# Altium PCB LbElectric.PcbDoc (part 1 of 2)
Units mil, origin at the board's own origin, x right, y up, seen from the top; angles counter-clockwise.
Board outline 7067.96 x 2323.86 mil, 2 copper layers (Top Layer, Bottom Layer), stack 12.8 mil thick; 133 components, 113 nets, 507 pads, 49 vias.
Unrouted connection lines stored in the file: 3.
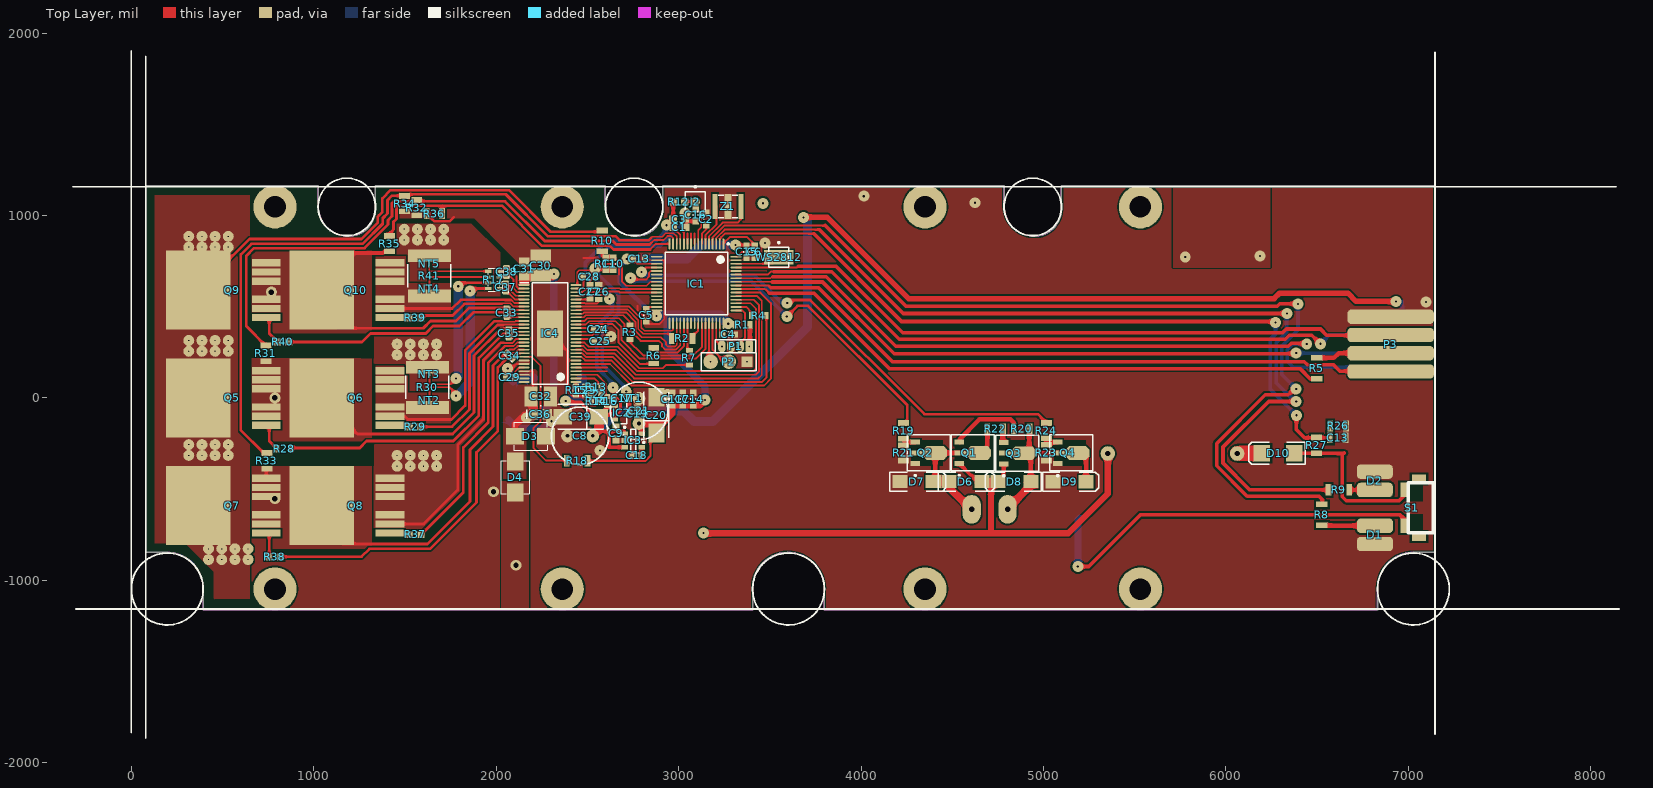
[diagram p0: Top Layer view]
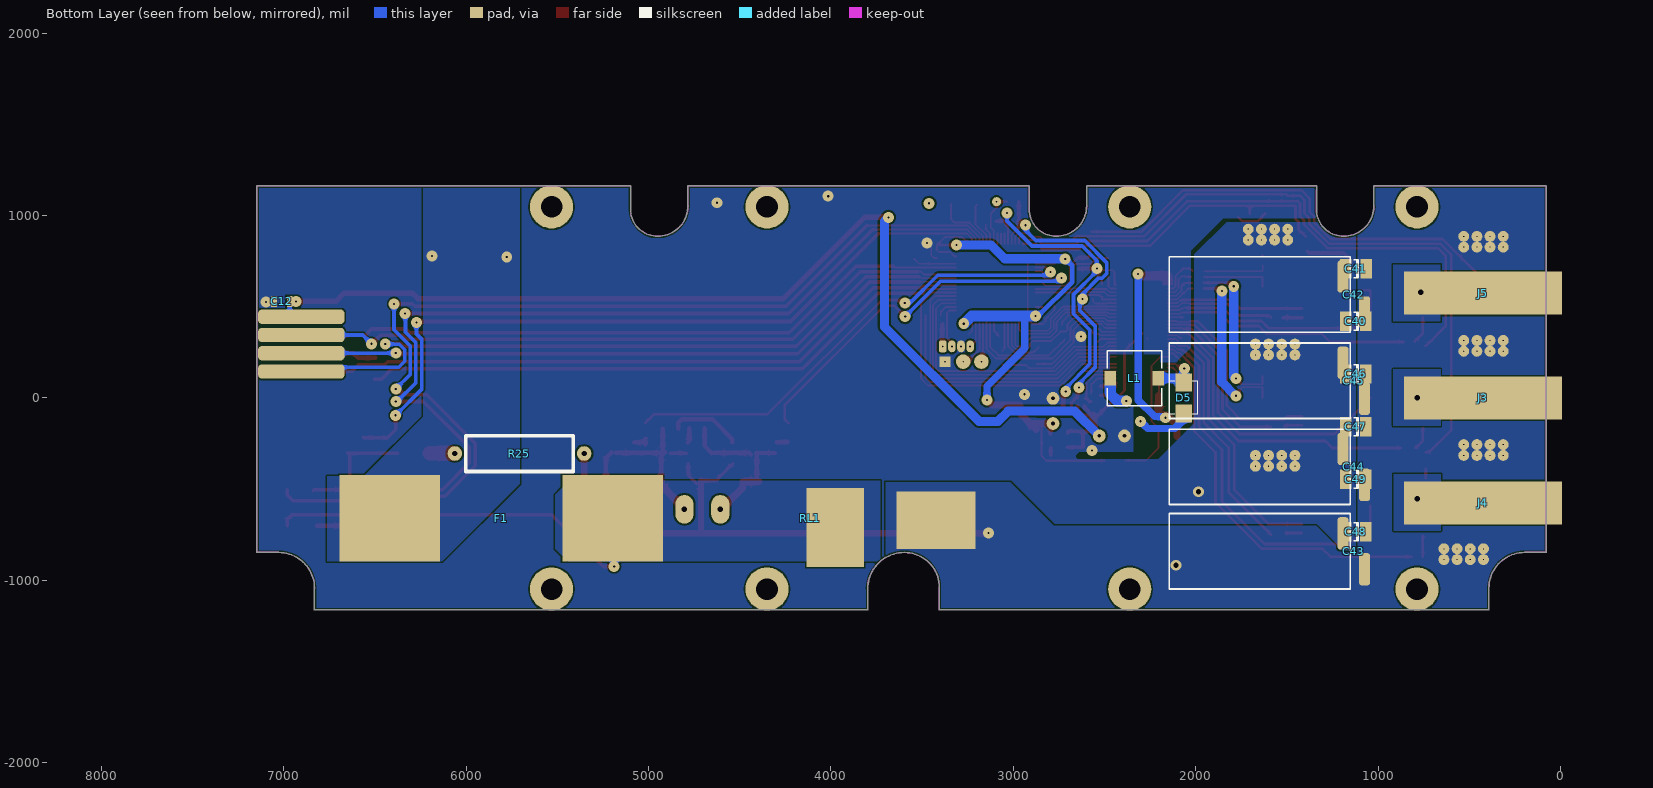
[diagram p1: Bottom Layer view, seen from below]

## Layer stack, top to bottom
Top Solder: solder mask 0.4, Solder Resist, Dk 3.5
Top Layer: signal copper 1.4
Dielectric1: core 10, FR-4, Dk 4.2
Bottom Layer: signal copper 1.4
Bottom Solder: solder mask 0.4, Solder Resist, Dk 3.5

## Board outline
196.85,-846.97 cw(c196.85,-1043.31) 393.19,-1043.31 393.19,-1161.42 ccw(c393.7,-1161.42) 393.7,-1161.93 3405.51,-1161.93 ccw(c3405.51,-1161.42) 3406.03,-1161.42 3406.03,-1038.53 cw(c3597.59,-1038.53) 3597.59,-846.97 cw(c3597.59,-1048.08) 3798.7,-1048.08 3798.7,-1161.42 ccw(c3799.21,-1161.42) 3799.21,-1161.93 6830.71,-1161.93 ccw(c6830.71,-1161.42) 6831.22,-1161.42 6831.22,-1043.31 cw(c7027.56,-1043.31) 7027.56,-846.97 7145.67,-846.97 ccw(c7145.67,-846.46) 7146.18,-846.46 7146.18,1161.42 ccw(c7145.67,1161.42) 7145.67,1161.93 5098.43,1161.93 ccw(c5098.43,1161.42) 5097.91,1161.42 5097.91,1034.17 cw(c4950.08,1034.17) 4950.08,886.34 cw(c4950.08,1052.44) 4783.98,1052.44 4783.98,1161.42 ccw(c4783.46,1161.42) 4783.46,1161.93 2913.39,1161.93 ccw(c2913.39,1161.42) 2912.87,1161.42 2912.87,1034.17 cw(c2765.04,1034.17) 2765.04,886.34 cw(c2765.04,1052.44) 2598.94,1052.44 2598.94,1161.42 ccw(c2598.43,1161.42) 2598.43,1161.93 1338.58,1161.93 ccw(c1338.58,1161.42) 1338.07,1161.42 1338.07,1034.17 cw(c1190.24,1034.17) 1190.24,886.34 cw(c1190.24,1052.44) 1024.14,1052.44 1024.14,1161.42 ccw(c1023.62,1161.42) 1023.62,1161.93 78.74,1161.93 ccw(c78.74,1161.42) 78.23,1161.42 78.23,-846.46 ccw(c78.74,-846.46) 78.74,-846.97

## Design rules (kind name [scope] priority, off if disabled: settings)
AssemblyTestPointUsage [All] p1 off:
AssemblyTestpoint [All] p1 off: testpointundercomponent=TRUE minsize=40 maxsize=100 preferedsize=60 minholesize=0 maxholesize=40 preferedholesize=32 testpointgrid=1 usegrid=TRUE gridtolerance=0.01 allowsidetop=TRUE allowsidebottom=TRUE
Clearance Clearance_Phases [InPolygon and InNetClass('Phases')] p1: gap=5 except(7: Arc-Poly Track-Poly SMDPad-Poly THPad-Poly Via-Poly Fill-Poly Poly-Poly)
Clearance "Clearance pads mounting" [(InNet('HOUSING_0') OR InNet('HOUSING_1') OR InNet('HOUSING_2')) AND IsPad] p2: gap=0.1
Clearance "Clearance main" [All] p3: gap=5.12 except(7.09: SMDPad-SMDPad SMDPad-THPad THPad-THPad; 8.27: SMDPad-Via THPad-Via Via-Via; 10.5: Arc-Poly Track-Poly SMDPad-Poly THPad-Poly Via-Poly Fill-Poly Poly-Poly)
ComponentClearance [All] p1 off: gap=10 collisioncheckmode=3 verticalgap=10 showdistances=FALSE
DiffPairsRouting [All] p1: maxlimit=10 minlimit=5 mostfreqgap=5 toplayer_minwidth=6 toplayer_maxwidth=25 toplayer_prefwidth=8 bottomlayer_minwidth=6 bottomlayer_maxwidth=25 bottomlayer_prefwidth=8 maxuncoupledlength=500
FabricationTestPointUsage [All] p1 off: valid=0 allowmultiple=FALSE
FabricationTestpoint [(IsPad And (OnTopLayer Or OnBottomLayer))] p1 off: side=3 testpointundercomponent=TRUE minsize=40 maxsize=100 preferedsize=60 minholesize=0 maxholesize=40 preferedholesize=32 testpointgrid=1 allowsidetop=TRUE allowsidebottom=TRUE usegrid=TRUE gridtolerance=0.01
HoleToHoleClearance [All] p1: gap=5.12 allowstackedmicrovias=TRUE
MinimumSolderMaskSliver [All] p1: minsoldermaskwidth=1.97
NetAntennae [All] p1 off: netantennaetolerance=10
PlaneClearance [All] p1: clearance=10
PlaneConnect [All] p1: planeconnectstyle=Direct reliefexpansion=7.87 reliefentries=4 reliefconductorwidth=0 reliefairgap=7.87
PolygonConnect [All] p1: connectstyle=Direct reliefconductorwidth=11.81 reliefentries=4 polygonreliefangle="90 Angle" airgapwidth=11.81
RoutingVias [All] p1: holewidth=11.81 width=60 viastyle="Through Hole" minholewidth=7.87 minwidth=55 maxholewidth=25 maxwidth=100
SilkToSilkClearance [All] p1 off: silktosilkclearance=3.94
SilkToSolderMaskClearance SilkscreenOverComponentPads [IsPad] p1 off: minsilkscreentomaskgap=5.12 clearancetoexposedcopper=TRUE
SolderMaskExpansion [All] p1: expansion=7.87
Width [All] p1: maxlimit=236.22 minlimit=10 preferedwidth=10
17 further rules are at their usual default settings.

## Classes and differential pairs
net class Control: 1_H_CONTROL 1_L_CONTROL 2_H_CONTROL 2_L_CONTROL 3_H_CONTROL NetIC1_34 NetIC1_52 NetIC1_53 SPI_SCK
net class Buck: NetC29_1 NetC29_2 NetIC4_3
net class "FET Drive": _CTRL_GND NetC33_2 NetC34_2 NetC35_2 PHASE_1 PHASE_2 PHASE_3 UH_P UL_N UL_P VH_P VL_P WH_P WL_N WL_P
net class Stabilizers: _3.3V _5V _AGND _REF NetC18_1
net class Sense: 1_SENSE 2_SENSE AN_IN NetC37_1 NetC37_2 NetC38_1 NetC38_2 NetNT2_1 NetNT3_1 NetNT4_1 NetNT5_1 TEMP_MOTOR
component class DRV1: C22 C23 C24 C25 C26 C27 C28 C29 C30 C31 C32 C33 C34 C35 C36 C37 C38 C39 D3 D4 D5 IC4 L1 R13 R14 R15 R16 R17 R18
component class PWR1: C40 C41 C42 C43 C44 C45 C46 C47 C48 C49 NT2 NT3 NT4 NT5 NT6 NT7 NT8 NT9 NT10 NT11 NT12 NT304 NT? Q5 Q6 Q7 Q8 Q9 Q10 R28 R29 R30 R31 R32 R33 R34 R35 R36 R37 R38 R39 R40 R41 VT?
component class CTR1: C1 C2 C3 C4 C5 C6 C7 C8 C9 C10 C11 C12 C13 C14 C15 C16 C17 C18 C19 C20 C21 D1 D2 H2.1 HL1 IC1 IC2 IC3 J2 NT1 P1 P2 P3 R1 R2 R3 R4 R5 R6 R7 R8 R9 R10 R11 R12 WS2812 Y1 Z1
component class Main: C13 D6 D7 D8 D9 D10 F1 J3 J4 J5 Q1 Q2 Q3 Q4 R19 R20 R21 R22 R23 R24 R25 R26 R27 RL1 S1

## Components (designator, comment, footprint, x,y, rotation, side; value= is the part's Value field where it differs from the comment)
C1 "2.2u" ERA-0603 3004,936 r0 top
C2 "0.1u" CAPC1608X08N(0603) 3152,981 r90 top
C3 "0.1u" ERA-0603 3003,981 r0 top
C4 "2.2u" CAPC1608X08N(0603) 3273,348 r0 top
C5 "2.2u" CAPC1608X08N(0603) 2823,453 r270 top
C6 "2.2u" CAPC1608X08N(0603) 3417,801 r270 top
C7 "2.2u" CAPC1608X08N(0603) 3022,-6 r90 top
C8 "CAP TANT POLY 220UF 6.3V 2312 15mOhm" CAP_POLY_330 2460,-208 r180 top
C9 "0.1u" ERA-0603 2657,-194 r270 top
C10 "0.1u" CAPC1608X08N(0603) 2641,735 r270 top
C11 "0.1u" CAPC1608X08N(0603) 2964,-6 r90 top
C12 "0.1u" 0805x 7010,529 r0 bottom
C13 "0.1u" CAPC1608X08N(0603) 2783,764 r0 top
C13 "0.1u" 0805x 6613,-218 r0 top
C14 "0.1u" CAPC1608X08N(0603) 3081,-6 r90 top
C15 "0.1u" CAPC1608X08N(0603) 3372,801 r270 top
C16 "0.1u" CAPC1608X08N(0603) 3093,1003 r270 top
C17 "0.1u" 0603x 2687,-2 r0 top
C18 "10nf 50V 10%" 0402small 2770,-315 r180 top
C19 "2.2u" CAPC1608X08N(0603) 2773,-86 r90 top
C20 "CAP TANT POLY 220UF 6.3V 2312 15mOhm" C 2878,-94 r90 top
C21 "CAP TANT POLY 220UF 6.3V 2312 15mOhm" CAP_POLY_330 2783,-71 r90 top
C22 "120pF 50V 5%" 0402small 2548,20 r0 top
C23 "6.8nF 50V 10%" 0402small 2490,41 r90 top
C24 "22nF 50V 10%" 0402small 2559,378 r180 top
C25 "2.2u 25V 10%" CAPC1608X08N(0603) 2569,312 r180 top
C26 "2.2uF 25V" 0603x 2562,581 r90 top
C27 "2.2u" 0603x 2514,582 r90 top
C28 "2.2u" CAPC1608X08N(0603) 2509,665 r0 top
C29 "0.1uF 50V" 0402small 2075,113 r0 top
C30 "2.2u 100V" "EIA CC1210" 2244,726 r90 top
C31 "0.1u" C0805 2154,707 r90 top
C32 "2.2u 100V" "EIA CC1210" 2244,9 r0 top
C33 "0.22uF 50V" 0402small 2058.41,467.54 r270 top
C34 "0.22uF 50V" 0402small 2073,231 r315 top
C35 "0.22uF 50V" 0402small 2068.41,353.43 r270 top
C36 "0.1u" C0805 2242,-89 r0 top
C37 "1nF 50V" 0402small 2053,606 r270 top
C38 "1nF 50V" 0402small 2057,691 r270 top
C39 "CAP TANT POLY 220UF 6.3V 2312 15mOhm" C 2464,-103 r180 top
C40 "2.2uF 100V" 1210 1122.43,420.15 r0 bottom
C41 "2.2uF 100V" 1210 1122.05,708.66 r0 bottom
C42 "1000uF 35V 10%" CAP_1000u_35V 1153.54,370.08 r90 bottom
C43 "1000uF 35V 10%" CAP_1000u_35V 1153.54,-1037.4 r90 bottom
C44 "1000uF 35V 10%" CAP_1000u_35V 1153.54,-574.8 r90 bottom
C45 "1000uF 35V 10%" CAP_1000u_35V 1153.54,-102.36 r90 bottom
C46 "2.2uF 100V" 1210 1122.43,131.64 r0 bottom
C47 "2.2uF 100V" 1210 1122.43,-156.87 r0 bottom
C48 "2.2uF 100V" 1210 1122.43,-733.89 r0 bottom
C49 "2.2uF 100V" 1210 1122.43,-445.38 r0 bottom
D1 "LED0" LED_3mm_SMD 6817,-750.22 r0 top
D2 "LED0" LED_3mm_SMD 6816,-454 r180 top
D3 "CDBB2100-G" SMB_real 2188,-210 r180 top
D4 "CDBB2100-G" SMB_real 2104,-434 r90 top
D5 "CDBB2100-G" SMB_real 2066.93,0 r90 bottom
D6 "Diode" DO214 4572,-458 r0 top
D7 "Diode" DO214 4305,-458 r0 top
D8 "Diode" DO214 4840,-458 r180 top
D9 "Diode" DO214 5142.9,-459 r0 top
D10 "Diode" SMB 6286,-303 r180 top
F1 "Fuse 1" FUSE_BIG 5807.09,-659.45 r0 bottom
IC1 "STM32F405" LQFP64_L 3097.66,627.02 r270 top
IC2 "LT1460KCS3-3.3" SOT23-3_L 2688,-81 r0 top
IC3 "TPS73233DBVT" SOT23-5_L 2751,-233 r0 top
IC4 "DRV8301DCAR" HTSSOP56(L) 2294.94,353.43 r180 top
J2 "Socket" PIN1#1 3092,1076 r0 top
J3 "1" BANANA-4MM 426.89,0 r180 top locked
J4 "2" BANANA-4MM 426.89,-574.8 r180 top locked
J5 "3" BANANA-4MM 426.89,574.8 r180 top locked
L1 "33u" DR74 2337,108 r0 bottom
NT1 "NET_TIE" NET_TIE_10mil 2749,-2 r180 top net-tie
NT2 "NET_TIE" NET_TIE_10mil 1634,-17 r90 top net-tie
NT3 "NET_TIE" NET_TIE_10mil 1633.86,135.8 r270 top net-tie
NT4 "NET_TIE" NET_TIE_10mil 1634,595 r90 top net-tie
NT5 "NET_TIE" NET_TIE_10mil 1633,742 r270 top net-tie
P1 "Header 4" MHDR1X4 3387,283 r180 top
P2 "Header 3" HDR1X3 3375,199 r180 top
P3 "Header 4X2" Nrf24l01 6903.07,295.28 r0 top
Q1 "BCX53" SOT89x 4593.05,-301.27 r270 top
Q2 "BCX56-16" SOT89x 4352.15,-301.27 r270 top
Q3 "BCX53" SOT89x 4837.05,-302.27 r270 top
Q4 "BCX56-16" SOT89x 5132.05,-301.27 r270 top
Q5 "IRF7530" D2PAK-7 366.14,0 r90 top locked
Q6 "IRF7530" D2PAK-7 1043.31,0 r90 top locked
Q7 "IRF7530" D2PAK-7 366.14,-590.55 r90 top locked
Q8 "IRF7530" D2PAK-7 1043.31,-590.55 r90 top locked
Q9 "IRF7530" D2PAK-7 366.14,590.55 r90 top locked
Q10 "IRF7530" D2PAK-7 1043.31,590.55 r90 top locked
R1 "Res1" 0603x 3350,401 r180 top
R2 "Res1" 1206x 3019,326 r0 top
R3 "Res1" 0603x 2733,360 r270 top
R4 "Res1" 0603x 3440,452 r180 top
R5 "Res1" 1206x 6498,163 r90 top
R6 "Res1" 0805x 2863,232 r90 top
R7 "Res1" 0603x 3059,221 r270 top
R8 "Res1" 1206x 6526,-640 r270 top
R9 "Res1" 1206x 6619,-504 r0 top
R10 "39k, 1%" 1206x 2581,861 r270 top
R11 "2.2k, 1%" RESC1608X05N(0603) 2601,735 r270 top
R12 "10k, 1%" RESC1608X05N(0603) 3002,1075 r0 top
R13 "15k, 1%" 0402small 2549,61 r0 top
R14 "3.3k, 1%" 0402small 2548,-19 r180 top
R15 "220k, 1%" 0402small 2438,41 r270 top
R16 "18k, 1%" 0402small 2610,-17 r90 top
R17 "100R" RES_ARRAY_4X 1987,679 r270 top
R18 "0" 1206x 2444,-344 r180 top
R19 "Res Semi" 0805x 4233,-180 r90 top
R20 "Res Semi" 0805x 4880,-169 r0 top
R21 "Res Semi" 0805x 4233,-302 r270 top
R22 "Res Semi" 0805x 4735,-169 r0 top
R23 "Res Semi" 0805x 5016,-300 r270 top
R24 "Res Semi" 0805x 5016,-178 r90 top
R25 "Res Semi" RES_2W 5412,-206 r0 bottom
R26 "Res Semi" 0805x 6615,-153 r0 top
R27 "Res Semi" 0805x 6497,-259 r90 top
R28 "4R7" 0603x 838,-278 r180 top
R29 "4R7" RESC1608X05N(0603) 1555.12,-157.48 r180 top
R30 "RES SMD 0.01 OHM 1% 2W 2512" 1T-2512-5x 1623,58 r90 top
R31 "39k, 1%" 0805x 738,245 r90 top
R32 "2.2k, 1%" 0805x 1565,1044 r90 top
R33 "39k, 1%" 0805x 743,-344 r90 top
R34 "2.2k, 1%" 0805x 1498,1066 r90 top
R35 "39k, 1%" 0805x 1415.53,846 r90 top
R36 "2.2k, 1%" 0805x 1662,1011 r0 top
R37 "4R7" RESC1608X05N(0603) 1555.12,-748.03 r180 top
R38 "4R7" RESC1608X05N(0603) 785,-871 r180 top
R39 "4R7" RESC1608X05N(0603) 1555,440 r180 top
R40 "4R7" RESC1608X05N(0603) 831,307 r180 top
R41 "RES SMD 0.01 OHM 1% 2W 2512" 1T-2512-5x 1633.86,669.29 r90 top
RL1 "RELAY_LATCH" LATCH_RELAY 3503.94,-610.24 r90 bottom
S1 "SW-PB" BTN_SMD_CORNER 6999,-464 r270 top
WS2812 "Socket" PIN1#2 3549,771 r0 top
Z1 "AWSCR-8.00CV-T" CRYSTAL_CERAMIC 3270,1050 r180 top

## Footprints (in the part's own frame and the unit in brackets; to place one, negate y for a bottom-side part, rotate by r counter-clockwise, add the part's x,y. Pads: shape width x height; smd on the part's side, far side on the other; paste and mask are expansions set on the pad)
1T-2512-5x [mm] "Chip Resistor; Body 6.4 x 3.2 mm (LxW typ)"
  rect 1.8x6 smd: 1(-2.8,0) 2(2.8,0)
  silkscreen extent -1.6,-3 1.6,3
0402small [mm] "Chip Resistor; Body 1.6 x 0.8 mm (LxW typ)"
  rect 0.7x0.8 smd: 1(-0.635,0) 2(0.635,0)
  silkscreen extent -0.8,-0.4 0.8,0.4
0603x [mm] "Chip Resistor; Body 1.6 x 0.8 mm (LxW typ)"
  rect 0.7x1 smd: 1(-1.016,0) 2(1.016,0)
0805x [mil] "Chip Resistor; Body 2 x 1.3 mm (LxW typ)"
  rect 33x59.06 smd: 1(42,0)
  rect 30x59.06 smd: 2(-43,0)
1206x [mm]
  rect 0.8x1.6 smd: 1(-1.45,0) 2(1.45,0)
1210 [mm] "Chip Capacitor; Body 3.2 x 2.5 mm (LxW typ)"
  rect 1.6x2.7 smd: 1(-1.4,0) 2(1.4,0)
  silkscreen extent -0.3,-1.25 0.3,1.25
BANANA-4MM [mm]
  rect 22x6 smd far side: 1(0,0)
  body extent -10.5,-3 10.5,3, height 5.79
BTN_SMD_CORNER [mm]
  rect 2x1.2 smd: 1(1,-0.5) 2(6,-0.5)
  rect 1.2x2 smd: 3(-0.5,1.5) 3(7.5,1.5)
  silkscreen extent 0,0 7,3.5
C [mm] "Capacitor, SM Tantalum; Body 6.0 x 3.2 mm (LxW typ)"
  rect 2.6x2.2 smd: 1(-2.5,0) 2(2.5,0)
  silkscreen extent -3.92,-1.75 3.15,1.87
C0805 [mm] "Chip Capacitor; Body 2.0 x 1.2 mm (LxW typ)"
  rect 1.3x1.5 smd: 1(-0.95,0) 2(0.95,0)
  silkscreen extent -1.9,-0.65 -1.9,0.65
CAP_1000u_35V [mm]
  rrect50% 4.5x1.524 smd: 1(2.5,-2) 2(7.5,1)
  silkscreen extent -0.25,0 10.25,25.2
CAP_POLY_330 [mil]
  round 70 hole 20: 1(-68.9,0) 2(68.9,0)
  silkscreen extent -157,-157 157,157
CAPC1608X08N(0603) [mm] "Chip Capacitor, 2-Leads, Body 1,60x0,80mm, IPC Medium Density"
  rect 0.9x0.9 smd: 1(-0.85,0) 2(0.85,0)
  silkscreen extent -0.1,-0.35 0.1,0.35, body extent -0.8,-0.4 0.8,0.4, height 0.8
CRYSTAL_CERAMIC [mm]
  rect 0.7x3.5 smd: 1(-1.8,0) 3(1.8,0)
  rect 1x3.5 smd: 2(0,0)
  silkscreen extent -1.35,-1.55 1.35,1.55
D2PAK-7 [mm] "SOT-89; Body 4.6 x 4.25 mm, inc. leads (LxW max); Reverse Pinning"
  rect 1.016x4 smd: 1(-3.81,-9.5) 2(-2.54,-9.5) 3(-1.27,-9.5) 4(1.27,-9.5) 5(2.54,-9.5) 6(3.81,-9.5)
  rect 11x9 smd: 7(0,0)
  body extent -5.5,-5.5 5.5,3.5, height 4.3
DO214 [mm] "DO-214-AC/SMA; 2 C-Bend Leads; Body 5.3 x 2.6 mm, inc. leads (LxW)"
  rect 2.1x1.85 smd: 1(-2.3,0) 2(2.3,0)
  silkscreen extent -3.75,-1.33 4.05,1.33
DR74 [mm] "Precision Wire Wound Inductor, 2-Leads, Body 7,60x7,60mm, IPC High Density"
  rect 1.6x2 smd: 1(-3.35,0) 2(3.35,0)
  silkscreen extent -3.8,-3.8 3.8,3.8, body extent -3.8,-3.8 3.8,3.8, height 4.35
"EIA CC1210" [mm]
  rect 1.8x2.8 smd: 1(-1.35,0) 2(1.35,0)
  silkscreen extent -0.05,-1.3 0.05,1.3, body extent -1.85,-1.4 1.85,1.4, height 2.8
ERA-0603 [mm] "Chip Resistor; Body 1.6 x 0.8 mm (LxW typ)"
  rect 1.1x1 smd: 1(-0.85,0) 2(0.85,0)
FUSE_BIG [mm]
  rect 14x12 smd: 1(-15.5,0) 2(15.5,0)
  body extent -21,-5 21,5, height 17.5
HDR1X3 [mil] "Connector; Header; 3 Position"
  rect 59.06x59.06 hole 10: 1(0,0)
  round 80 hole 10: 2(100,0) 3(200,0)
  silkscreen extent -50,-50 250,50
HTSSOP56(L) [mm]
  oval 1.5x0.25 smd: 1(-3.625,6.75) 2(-3.625,6.25) 3(-3.625,5.75) 4(-3.625,5.25) 5(-3.625,4.75) 6(-3.625,4.25) 7(-3.625,3.75) 8(-3.625,3.25) 9(-3.625,2.75) 10(-3.625,2.25) 11(-3.625,1.75) 12(-3.625,1.25) 13(-3.625,0.75) 14(-3.625,0.25) 15(-3.625,-0.25) 16(-3.625,-0.75) 17(-3.625,-1.25) 18(-3.625,-1.75) 19(-3.625,-2.25) 20(-3.625,-2.75) 21(-3.625,-3.25) 22(-3.625,-3.75) 23(-3.625,-4.25) 24(-3.625,-4.75) 25(-3.625,-5.25) 26(-3.625,-5.75) 27(-3.625,-6.25) 28(-3.625,-6.75) 29(3.625,-6.75) 30(3.625,-6.25) 31(3.625,-5.75) 32(3.625,-5.25) 33(3.625,-4.75) 34(3.625,-4.25) 35(3.625,-3.75) 36(3.625,-3.25) 37(3.625,-2.75) 38(3.625,-2.25) 39(3.625,-1.75) 40(3.625,-1.25) 41(3.625,-0.75) 42(3.625,-0.25) 43(3.625,0.25) 44(3.625,0.75) 45(3.625,1.25) 46(3.625,1.75) 47(3.625,2.25) 48(3.625,2.75) 49(3.625,3.25) 50(3.625,3.75) 51(3.625,4.25) 52(3.625,4.75) 53(3.625,5.25) 54(3.625,5.75) 55(3.625,6.25) 56(3.625,6.75)
  rect 3.61x6.35 smd: 57(0,0)
  silkscreen extent -3.75,-7.05 2.47,7.55, body extent -3.1,-7.05 3.1,7.05, height 1.1
LATCH_RELAY [mm]
  rect 8x11 smd: 1(-1.5,-2)
  rect 11x8 smd: 2(-2.5,12)
  oval 3.988x2.54 hole 0.762: 3(0,28) 4(0,33)
  body extent 0,0 35,39, height 4.8
LED_3mm_SMD [mm]
  rrect50% 5x2 smd: 1(0,1.27) 2(0,-1.27)
LQFP64_L [mm] "Thin QFP, 64-Leads, Body 10x10mm, Pitch 0.5mm, IPC High Density"
  oval 1.55x0.25 smd: 1(-5.525,3.75) 2(-5.525,3.25) 3(-5.525,2.75) 4(-5.525,2.25) 5(-5.525,1.75) 6(-5.525,1.25) 7(-5.525,0.75) 8(-5.525,0.25) 9(-5.525,-0.25) 10(-5.525,-0.75) 11(-5.525,-1.25) 12(-5.525,-1.75) 13(-5.525,-2.25) 14(-5.525,-2.75) 15(-5.525,-3.25) 16(-5.525,-3.75) 33(5.525,-3.75) 34(5.525,-3.25) 35(5.525,-2.75) 36(5.525,-2.25) 37(5.525,-1.75) 38(5.525,-1.25) 39(5.525,-0.75) 40(5.525,-0.25) 41(5.525,0.25) 42(5.525,0.75) 43(5.525,1.25) 44(5.525,1.75) 45(5.525,2.25) 46(5.525,2.75) 47(5.525,3.25) 48(5.525,3.75)
  oval 0.25x1.55 smd: 17(-3.75,-5.525) 18(-3.25,-5.525) 19(-2.75,-5.525) 20(-2.25,-5.525) 21(-1.75,-5.525) 22(-1.25,-5.525) 23(-0.75,-5.525) 24(-0.25,-5.525) 25(0.25,-5.525) 26(0.75,-5.525) 27(1.25,-5.525) 28(1.75,-5.525) 29(2.25,-5.525) 30(2.75,-5.525) 31(3.25,-5.525) 32(3.75,-5.525) 49(3.75,5.525) 50(3.25,5.525) 51(2.75,5.525) 52(2.25,5.525) 53(1.75,5.525) 54(1.25,5.525) 55(0.75,5.525) 56(0.25,5.525) 57(-0.25,5.525) 58(-0.75,5.525) 59(-1.25,5.525) 60(-1.75,5.525) 61(-2.25,5.525) 62(-2.75,5.525) 63(-3.25,5.525) 64(-3.75,5.525)
  silkscreen extent -5.65,-4.35 4.35,4.55, body extent -5,-5 5,5, height 1.6
MHDR1X4 [mil] "Connector; Header; 4 Position"
  rrect50% 42x65 hole 10: 1(0,0)
  oval 42x65 hole 10: 2(50,0) 3(100,0) 4(150,0)
  silkscreen extent -35,-35 185,35
NET_TIE_10mil [mil] "Net tie"
  rect 10x10 smd paste+0 mask+0: 1(9.84,0) 2(0,0)
Nrf24l01 [mm]
  rrect50% 12x2 smd: 1(0,3.81) 3(0,1.27) 5(0,-1.27) 7(0,-3.81)
  rrect50% 12x2 smd far side: 2(0,3.81) 4(0,1.27) 6(0,-1.27) 8(0,-3.81)
PIN1#1 [mil] "Connector; Plug"
  round 50 hole 10: 1(0,0)
  silkscreen extent -55,-55 55,86
PIN1#2 [mil] "Connector; Plug"
  rect 160x80 smd: 1(0,0)
  silkscreen extent -55,-55 55,86
RES_2W [mil]
  round 80 hole 30: 1(-59.06,98.43) 2(649.61,98.43)
  silkscreen extent 0,0 591,197
RES_ARRAY_4X [mm]
  rect 0.45x0.9 smd: 1(-0.4,0.8) 2(-0.4,-0.8) 3(0.4,0.8) 4(0.4,-0.8) 5(1.2,0.8) 6(1.2,-0.8) 7(2,0.8) 8(2,-0.8)
  silkscreen extent -0.8,-0.8 2.4,0.8
RESC1608X05N(0603) [mm] "Chip Resistor, 2-Leads, Body 1,60x0,85mm, IPC Medium Density"
  rect 1x1 smd: 1(-0.8,0) 2(0.8,0)
  body extent -0.85,-0.48 0.85,0.47, height 0.5
SMB [mm] "DO-214-AA/SMB; 2 C-Bend Leads; Body 5.3 x 3.6 mm, inc. leads (LxW)"
  rect 2.3x2.3 smd: 1(-2.25,0) 2(2.25,0)
  silkscreen extent -3.8,-1.55 4.1,1.55
SMB_real [mm]
  rect 2.5x2.3 smd: 1(-2.15,0) 2(2.15,0)
  silkscreen extent -2.3,-1.98 2.3,1.97
SOT23-3_L [mm] "SOT23, 3-Leads, Body 2.9x1.3mm, Pitch 0.95mm, Lead Span 2.3mm, IPC High Density"
  rect 1x0.6 smd: 1(-1,0.95) 2(-1,-0.95) 3(1,0)
  silkscreen extent -1.12,-1.5 0.7,1.92, body extent -0.7,-1.5 0.7,1.5, height 1.2
SOT23-5_L [mm] "SOT23, 5-Leads, Body 2.9x1.6mm, Pitch 0.95mm, Lead Span 2.8mm, IPC High Density"
  rect 0.9x0.65 smd: 1(-1.2,0.95) 2(-1.2,0) 3(-1.2,-0.95) 4(1.2,-0.95) 5(1.2,0.95)
  silkscreen extent -1.32,-1.55 0.35,1.95, body extent -0.9,-1.55 0.9,1.55, height 1.45
SOT89x [mm] "SOT-89; Body 4.6 x 4.25 mm, inc. leads (LxW max); Reverse Pinning"
  rect 0.7x1.35 smd: 1(1.5,-1.388) 3(-1.5,-1.388)
  rect 0.7x1.8 smd: 2(0,-1.162)
  oct 1.9x3.3 smd: 2(0,1.388)
  silkscreen extent -2.5,-2.51 3.27,3.49

## Part data
C1 C2 C3 C4 C5 C6 C7 C9 C10 C11 C12 C13 C13 C14 C15 C16 C17 C18 C19 C22 C23 C24 C25 C26 C27 C28 C29 C30 C31 C32 C33 C34 C35 C36 C37 C38 C40 C41 C42 C43 C44 C45 C46 C47 C48 C49: library part "Ceramic Chip Capacitor"
C8 C20 C21 C39: library part "Tantalum Chip Capacitor"
D1 D2: "Typical INFRARED GaAs LED"
D3 D4 D5: library part ES1A...D
D6 D7 D8 D9 D10: "Default Diode"
F1: "Fuse"
IC1: "STM32 ARM-based 32-bit MCU"
IC2: library part PreciseRef
IC3: library part TPS7xx33
IC4: library part DRV8301
J3 J4 J5: library part Socket, "Socket"
L1: library part DR74
NT1 NT2 NT3 NT4 NT5: library part "Net tie", "Net tie"
P1: "Header, 4-Pin"
P2: "Header, 3-Pin"
P3: "Header, 4-Pin, Dual row"
Q1 Q3: "PNP Medium Power Transistor"
Q2 Q4: library part BCX53-16, "PNP Medium Power Transistor"
R1 R2 R3 R4 R5 R6 R7 R8 R9: "Resistor"
R10 R11 R12 R13 R14 R15 R16 R18 R28 R29 R30 R31 R32 R33 R34 R35 R36 R37 R38 R39 R40 R41: library part SMD
R17: library part RES_Array_4x, "742C0431000FP"
R19 R20 R21 R22 R23 R24 R25 R26 R27: "Semiconductor Resistor"
S1: "Switch"
Z1: library part Crystal_smd_with_caps

## Free pads (board coordinates)
  round 60 hole 5: 23(314.96,-314.96) 23(314.96,255.91) 23(314.96,826.77) 23(423.23,-885.83) 23(1456.69,236.22) 23(1456.69,-374.02) 23(1496.06,866.14) 24(387.14,-314.96) 24(387.14,255.91) 24(387.14,826.77) 24(495.41,-885.83) 24(1528.87,236.22) 24(1528.87,-374.02) 24(1568.24,866.14) 25(459.32,-314.96) 25(459.32,255.91) 25(459.32,826.77) 25(567.59,-885.83) 25(1601.05,236.22) 25(1601.05,-374.02) 25(1640.42,866.14) 26(531.5,-314.96) 26(531.5,255.91) 26(531.5,826.77) 26(639.76,-885.83) 26(1673.23,236.22) 26(1673.23,-374.02) 26(1712.6,866.14) 27(531.5,-255.91) 27(531.5,314.96) 27(531.5,885.83) 27(639.76,-826.77) 27(1673.23,295.28) 27(1673.23,-314.96) 27(1712.6,925.2) 28(459.32,-255.91) 28(459.32,314.96) 28(459.32,885.83) 28(567.59,-826.77) 28(1601.05,295.28) 28(1601.05,-314.96) 28(1640.42,925.2) 29(387.14,-255.91) 29(387.14,314.96) 29(387.14,885.83) 29(495.41,-826.77) 29(1528.87,295.28) 29(1528.87,-314.96) 29(1568.24,925.2) 30(314.96,-255.91) 30(314.96,314.96) 30(314.96,885.83) 30(423.23,-826.77) 30(1456.69,295.28) 30(1456.69,-314.96) 30(1496.06,925.2)
  round 60 hole 30: 26(767.72,580.71) 26(787.4,-551.18) 26(787.4,0)
  round 236.22 hole 118.11: H(787.4,-1047.24) H(787.4,1047.24) H(2362.2,-1047.24) H(2362.2,1047.24) H(4350.39,-1047.24) H(4350.39,1047.24) H(5531.5,-1047.24) H(5531.5,1047.24)

## Via types
v1: diameter 60, hole 11.81, Top Layer to Bottom Layer, 47 vias
v2: diameter 60, hole 28, Top Layer to Bottom Layer, 2 vias

## Nets (pads, with @x,y where several pads share a name; then routed paths per layer and width w, separated by ;. In a path a pad name is that pad's centre, name@x,y a point inside that pad or via, vN(x,y) a via of type N, cw(c..) or ccw(c..) an arc to the next point about the centre after c; other vN are vias at no path point)
1_H_CONTROL: IC1.43 IC4.17 | length 1010.6
  Top Layer w10: IC4.17@2437.66,402.64 2490.64,402.64 2509,421 2654,421 2687,388 2687,316 2787,216 3095,216 3147,268 IC1.43@3147,413
1_L_CONTROL: IC1.36 IC4.18 | length 806.8
  Top Layer w10: IC4.18@2437.66,422.32 2485.32,422.32 2500,437 2673,437 2703,407 2703,375 2714,364 2741,364 2792,313 ; 2791,313 2792,313 ; IC1.36@3009.08,409.5 3009.08,288.08 2987,266 2925,266 2909,282 2909,296 2892,313 2792,313
1_SENSE: IC1.27 IC4.25 | length 454.9
  Top Layer w10: IC4.25@2437.66,560.12 2480.12,560.12 2501,581 2605,581 2608,584 2671,584 2677.2,577.8 IC1.27@2880.14,577.8
2_H_CONTROL: IC4.19 R3.1 | length 333.5
  Top Layer w10: IC4.19@2437.66,442.01 2480.01,442.01 2491,453 2696,453 2732,417 2732,403 R3.1@2736,399
2_L_CONTROL: IC1.35 IC4.20 | length 791.7
  Top Layer w10: IC4.20@2437.66,461.69 2475.69,461.69 2483,469 2712,469 2763,418 2763,368 2798,333 2903,333 2931,305 2931,292 2941,282 2981,282 2989.39,290.39 IC1.35@2989.39,409.5
2_SENSE: IC1.26 IC4.26 | length 452.7
  Top Layer w10: IC4.26@2437.66,579.8 2472.8,579.8 2490,597 2595,597 2599,601 2676,601 2679.51,597.49 IC1.26@2880.14,597.49
3_H_CONTROL: IC4.21 R2.1 | length 606.4
  Top Layer w10: IC4.21@2437.66,481.38 2470.38,481.38 2474,485 2720,485 2779,426 2779,378 2805,352 2948,352 R2.1@2956,344
+48V: C40.1 C41.1 C42.1 C43.1 C44.1 C45.1 C46.1 C47.1 C48.1 C49.1 D4.1 D6.2 D8.2 pad.23@314.96,255.91 pad.23@314.96,826.77 pad.23@314.96,-314.96 pad.23@423.23,-885.83 pad.24@387.14,255.91 pad.24@387.14,826.77 pad.24@387.14,-314.96 pad.24@495.41,-885.83 pad.25@459.32,255.91 pad.25@459.32,826.77 pad.25@459.32,-314.96 pad.25@567.59,-885.83 pad.26@531.5,255.91 pad.26@531.5,826.77 pad.26@531.5,-314.96 pad.26@639.76,-885.83 pad.27@531.5,314.96 pad.27@531.5,885.83 pad.27@531.5,-255.91 pad.27@639.76,-826.77 pad.28@459.32,314.96 pad.28@459.32,885.83 pad.28@459.32,-255.91 pad.28@567.59,-826.77 pad.29@387.14,314.96 pad.29@387.14,885.83 pad.29@387.14,-255.91 pad.29@495.41,-826.77 pad.30@314.96,314.96 pad.30@314.96,885.83 pad.30@314.96,-255.91 pad.30@423.23,-826.77 Q1.1 Q3.1 Q5.7 Q7.7 Q9.7 R10.1 R25.1 RL1.1 | length 5748.2
  Top Layer w15: Q9.7@366.14,590.55 647.59,872 1262,872 1351,961 1351,994 1358,1001 ; 1357,1001 1376,1020 1376,1094 1421,1139 2070,1139 2298,911 R10.1@2573,911
  Top Layer w20: Q1.1@4538.42,-360.32 4632.1,-454 D8.2@4712,-454 ; D8.2@4736,-470 4782.42,-423.58 Q3.1@4782.42,-361.32
  Top Layer w35: v1(3137,-740) 3139,-742 4712,-742 ; D8.2@4712,-454 4712,-742 ; R25.1@5353,-304 5353,-525 5136,-742 4712,-742
  other v2: 2109,-917
_3.3V: C6.1 C7.1 C11.1 C13.1@2749.54,764 C14.1 C15.1 C19.1 C20.1 C21.1 IC1.1 IC1.19 IC1.32 IC1.48 IC1.64 IC3.5 R1.2 R18.1 | length 3726.5
  Top Layer w10: C13.1@2748,759 2771.72,735.28 IC1.19@2880.14,735.28 ; IC1.32@2880.14,479.38 2880.14,448.86 v1@2881,448 ; IC1.48@3245.3,409.5 3269.5,409.5 v1(3272,407) ; IC1.1@3245.3,844.54 3245.3,847.3 3280,882 3376,882 C6.1@3419,839 ; v1(3312,838) 3375,838 C15.1@3378,835 ; IC1.64@3315.18,774.65 3320.65,774.65 3346,800 3409,800 3419,810 C6.1@3419,839 ; C15.1@3371,841 3373,839 C6.1@3419,839 ; C6.1@3421,837 C6.1@3419,839
  Top Layer w12: R18.1@2501.09,-344 2819,-344 2845,-318 C20.1@2845,-154
  Top Layer w25: C21.1@2780,-139 2780.9,-139.9 2798.24,-157.24 IC3.5@2798.24,-195.6
  Top Layer w40: C21.1@2776,-139.9 2780.9,-139.9 C21.1@2783,-139.9 2899,-139.9 ; C20.1@2875,-172 2964,-83 2964,-38 3116,-38 v1@3141,-13
  Bottom Layer w25: v1@2715,763 2678,726 2678,635 v1@2866,447
  Bottom Layer w40: 2938,274 2938,447 ; 2940,269 3144,65 3144,-13 v1@3145,-14
  Bottom Layer w50: v1@2715,763 3047,763 3122,838 v1(3312,838)
  Bottom Layer w60: v1(2878.14,449.86) 3228.14,449.86 v1@3269,409
  other v1: 3145,-11 2716,762
_5V: C8.1 C9.1 C12.2 C39.1 IC2.1 IC3.1 IC3.3 L1.2 P3.2 R16.1 | length 6726.9
  Top Layer w20: v1(2381,-17) 2387,-23 2463,-23 2542,-102 C39.1@2562.42,-102 ; C39.1@2553,-95 C39.1@2567,-95 ; 2555,-182 2618,-182 ; C39.1@2563,-99 C39.1@2567,-95 ; R16.1@2611,-42 2611,-51 C39.1@2567,-95 ; IC2.1@2648.63,-43.6 2648.63,-62.37 2616,-95 C39.1@2567,-95 ; IC3.1@2701,-194 2701,-182 2618,-182 ; IC3.3@2703.76,-270.4 2618,-270.4 2618,-182
  Top Layer w30: v1@3691,991 3814,991 4261,544 6264,544 6295,575 6668,575 6714,529 v1(6932,529)
  Top Layer w50: C8.1@2528.9,-208 2563,-173.9 C39.1@2563,-99
  Bottom Layer w20: v1(6932,529) C12.2@6967,529 6967,443 P3.2@6965,441
  Bottom Layer w50: C8.1@2528.9,-208 2664.9,-72 3028,-72 3085,-129 3188,-129 3707,390 3707,968 v1(3685,990)
  Bottom Layer w60: v1(2381,-17) 2430,-17 2469,22 L1.2@2469,104
_AGND: C1.2 C3.2 C10.2 C16.2 C17.2 C27.2 C28.2 IC1.12 IC2.3 IC4.28 NT1.1 R11.2 | length 2173.2
  Top Layer w10: IC4.28@2437.66,619.17 2445,619.17 2445,689 2456,700 2509,700 C28.2@2539.5,669.5 ; C27.2@2514,622 2514,642 C28.2@2539.73,667.73 ; v1@2710,60 v1@2713,57 ; IC1.12@3028.76,844.54 C1.2@3028.76,936 ; C1.2@3028.76,945 C3.2@3028.76,981
  Top Layer w20: v1(2542.46,709.46) 2639.54,709.46 C10.2@2642,707 ; C1.2@3037,945 3037,969.54 C16.2@3093,969.54
  Top Layer w25: IC2.3@2727.37,-81 v1@2727.37,42.63
  Bottom Layer w20: v1@2537,716 v1@2542.46,716 ; v1(2713,36) 2713,54 2581,186 2581,373 2670,462 2670,567 2542.46,694.54 v1(2542.46,709.46) v1@2542.46,716 ; v1@3035,1012 3035,970 2898,833 2622,833 2542.46,753.46 v1@2542.46,716
  other v1: 3034,1013
_CTRL_GND: C2.2 C4.2 C5.2 C6.2 C7.2 C8.2 C9.2 C11.2 C12.1 C13.1@6655,-218 C13.2@2816.47,764 C14.2 C15.2 C18.2 C19.2 C20.2 C21.2 C22.1 C23.1 C25.1 C26.2 C30.2 C31.2 C32.2 C36.2 C39.2 C40.2 C41.2 C42.2 C43.2 C44.2 C45.2 C46.2 C47.2 C48.2 C49.2 D1.2 D2.2 D3.1 D5.1 D7.1 D9.1 IC1.18 IC1.60 IC1.63 IC3.2 IC4.7 IC4.44 IC4.57 NT1.2 NT3.2 NT5.2 P1.3 P2.1 P3.1 pad.23@1456.69,236.22 pad.23@1456.69,-374.02 pad.23@1496.06,866.14 pad.24@1528.87,236.22 pad.24@1528.87,-374.02 pad.24@1568.24,866.14 pad.25@1601.05,236.22 pad.25@1601.05,-374.02 pad.25@1640.42,866.14 pad.26@1673.23,236.22 pad.26@1673.23,-374.02 pad.26@1712.6,866.14 pad.27@1673.23,295.28 pad.27@1673.23,-314.96 pad.27@1712.6,925.2 pad.28@1601.05,295.28 pad.28@1601.05,-314.96 pad.28@1640.42,925.2 pad.29@1528.87,295.28 pad.29@1528.87,-314.96 pad.29@1568.24,925.2 pad.30@1456.69,295.28 pad.30@1456.69,-314.96 pad.30@1496.06,925.2 Q2.1 Q4.1 Q8.2 Q8.3 Q8.4 Q8.5 Q8.6 R14.2 R15.2 R21.1 R23.1 R26.1 R30.2 R32.2 R34.2 R36.2 R41.2 Z1.2 | length 3455.6
  Top Layer w10: 2039.37,301 2088,301 2110.9,323.9 IC4.44@2152.23,323.9 ; IC4.57@2264,323.9 IC4.57@2264,327 ; 2478,767 2543,767 2575,735 2659,735 2674,720 2674,675 ; 2775,505 2775,482 2823,434 C5.2@2823,419.53 2837.53,405 2893,405 2921,433 2921,755 IC1.18@2876,755 ; C6.2@3417,767.53 3436.53,767.53 3450,781 3450,827 v1(3473,850)
  Top Layer w15: Q8.2@1417.32,-690.55 1602.45,-690.55 1789,-504 1789,-258 1931,-116 1931,207 2027,303 2042,303 ; R36.2@1619,1011 1662,968 1745,968 1767,990 ; R41.2@1633,779 R41.2@1636,782 ; IC4.57@2294.94,353.43 2391,257.37 2391,41 2419,13 C22.1@2525,13 ; C25.1@2612.46,310 2612.46,319.46 2629,336 v1(2629,337) v1@2637,345
  Bottom Layer w40: D5.1@2066.93,-118.11 2116.14,-167.32 2263.78,-167.32 v1(2303.15,-127.95)
  other v1: 2569.15,-287.95 2939,20 7096,527 4624,1070 4015,1106
  other v2: 1986,-514
_DRV_PWR: C30.1 C31.1 C32.1 C36.1 D3.2 D4.2 IC4.29 IC4.53 IC4.54 | length 1840
  Top Layer w10: IC4.29@2130.23,620.17 C31.1@2130.23,662.77 ; IC4.29@2139.23,619.17 C31.1@2139.23,661.77 ; IC4.29@2145.23,619.17 C31.1@2145.23,661.77 ; C31.1@2152,663 2152.23,662.77 2152.23,661.77 IC4.29@2152.23,619.17 ; IC4.53@2152.23,146.73 2201,146.73 C32.1@2201,3 ; IC4.29@2162.23,622.17 C31.1@2162.23,664.77 ; IC4.29@2172.23,622.17 C31.1@2172.23,664.77 ; IC4.29@2176.23,622.17 C31.1@2176.23,664.77
  Top Layer w20: C31.1@2146.85,667.15 C31.1@2152.23,661.77 ; v1@2306.6,669.6 v1(2316,679)
  Top Layer w40: D3.2@2103.36,-210 2103.36,-146.64 2141.73,-108.27 v1(2165.35,-108.27) 2165.35,-105.35 2155,-95 C36.1@2198,-95 ; C36.1@2204.6,-89 C32.1@2204.6,11.6
  Top Layer w50: C31.1@2154,669.6 v1@2306.6,669.6
  Bottom Layer w40: v1@2171.61,-102.02 2224.98,-102.02 2315,-12 2315,673 2316,674 v1(2316,679)
_IN: F1.2
  other v1: 5777,773 6186,779